# Altium PCB RF315Mhz.PcbDoc
Units mm, origin at the board's own origin, x right, y up, seen from the top; angles counter-clockwise.
Board outline 32.5 x 47.16 mm, 2 copper layers (Top Layer, Bottom Layer); 30 components, 20 nets, 107 pads, 15 vias.
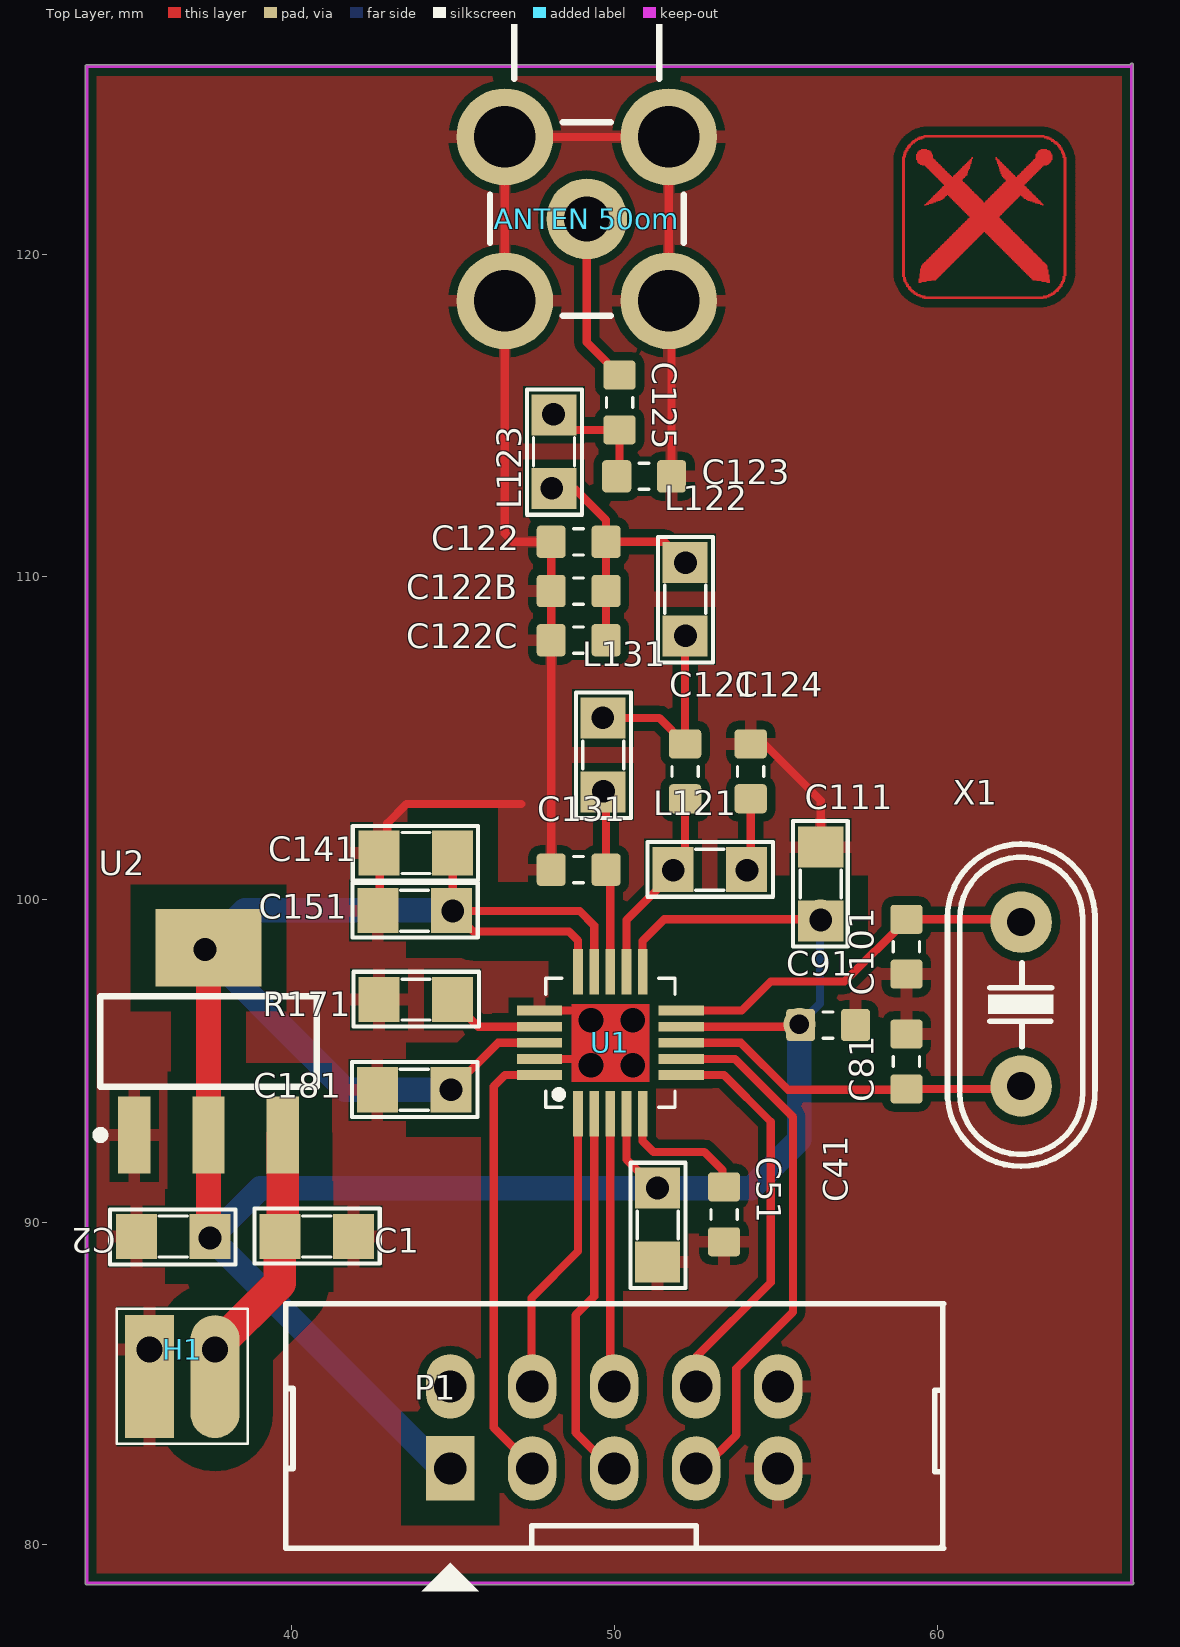
[diagram p0: Top Layer view]
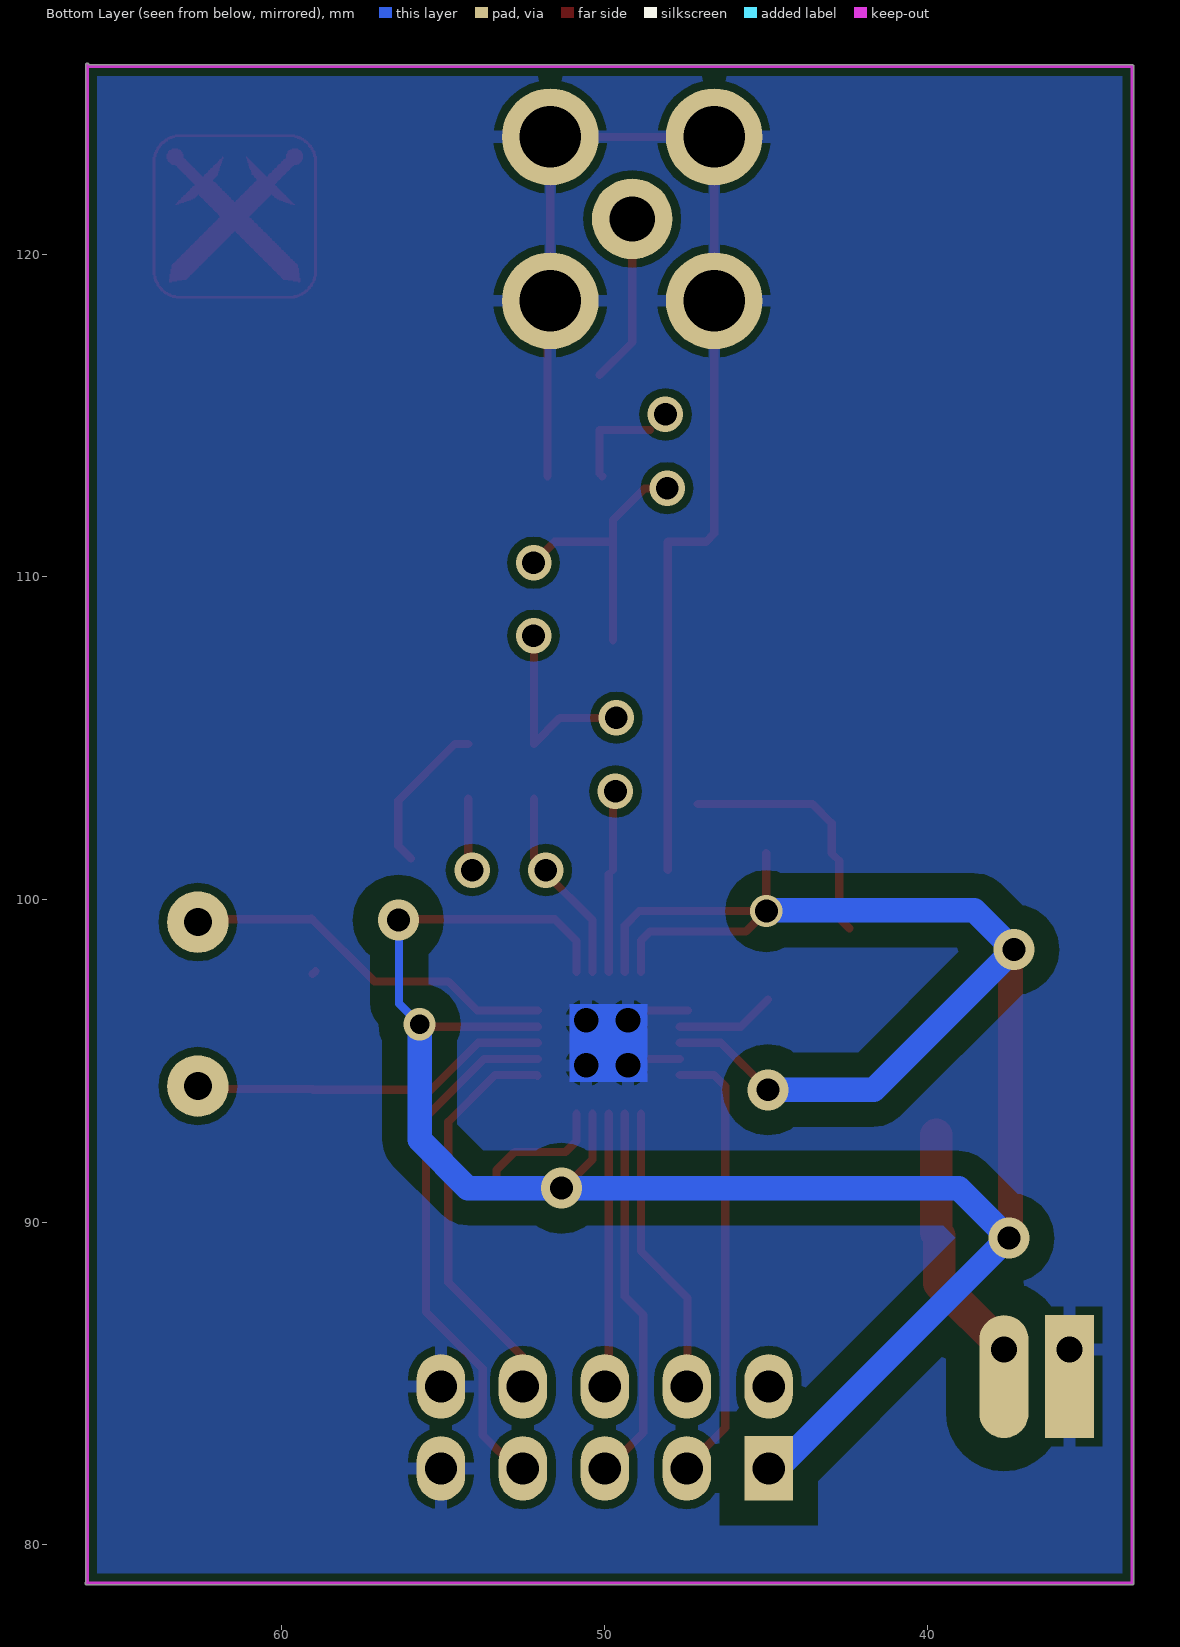
[diagram p1: Bottom Layer view, seen from below]
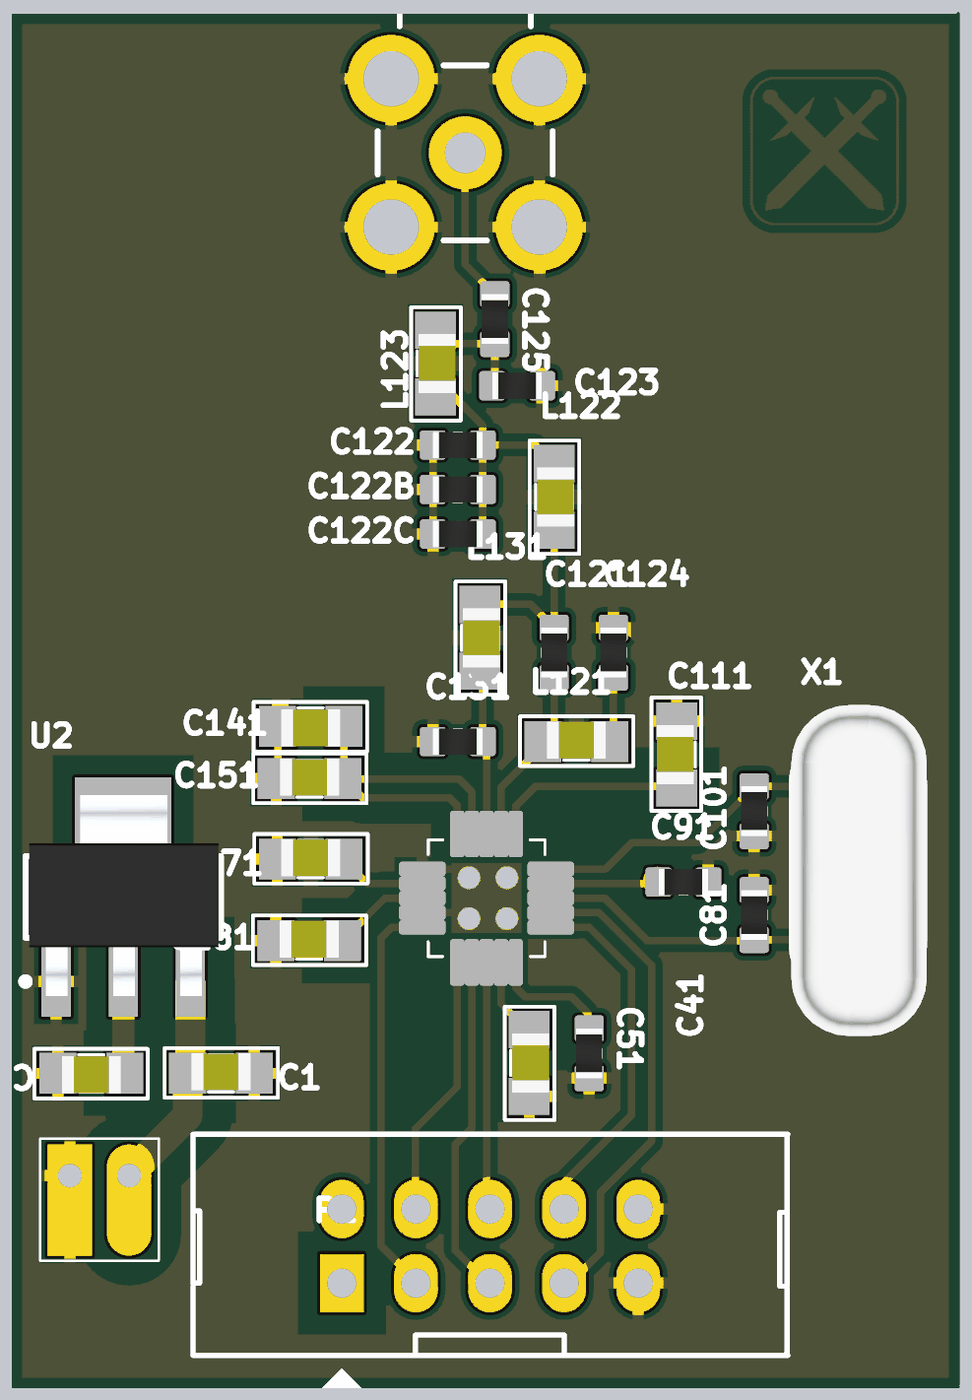
[diagram p2: 3D render of the assembled board from above, using the file's embedded part models]

## Layer stack, top to bottom
Top Layer: signal copper 0.0356
Dielectric: dielectric 0.32, FR-4, Dk 4.8
Bottom Layer: signal copper 0.0356

## Board outline
33.644,78.766 cw(c33.644,78.816) 33.594,78.816 33.594,125.82 cw(c33.644,125.82) 33.644,125.87 65.979,125.87 65.979,125.871 cw(c66.029,125.871) 66.079,125.871 66.079,78.881 cw(c66.029,78.881) 66.072,78.855 cw(c66.04,78.816) 66.09,78.816 cw(c66.04,78.816) 66.04,78.766

## Design rules (kind name [scope] priority, off if disabled: settings)
Clearance 5 [InNet('+5V')] p1: gap=1.016
Clearance 3.3 [InNet('+3.3V')] p2: gap=0.762
Clearance [All] p3: gap=0.254
ComponentClearance [All] p1: gap=0.051 collisioncheckmode=3 verticalgap=0.051 showdistances=FALSE
PolygonConnect [All] p1: connectstyle=Relief reliefconductorwidth=0.381 reliefentries=4 polygonreliefangle="90 Angle" airgapwidth=0.254
RoutingVias [All] p1: holewidth=0.711 width=1.27 viastyle="Through Hole" minholewidth=0.711 minwidth=1.27 maxholewidth=0.711 maxwidth=1.27
ShortCircuit [All] p1: allowed=TRUE
SilkToSilkClearance [All] p1: silktosilkclearance=0.051
SilkToSolderMaskClearance [IsPad] p1: minsilkscreentomaskgap=0 clearancetoexposedcopper=TRUE
SolderMaskExpansion [All] p1: expansion=0.102
Width 5v [InNet('+5V')] p1: maxlimit=1.016 minlimit=1.016 preferedwidth=1.016
Width 3.3v [InNet('+3.3V')] p2: maxlimit=0.254 minlimit=0.254 preferedwidth=0.254
Width [All] p3: maxlimit=0.254 minlimit=0.254 preferedwidth=0.254
24 further rules are at their usual default settings.

## Components (designator, comment, footprint, x,y, rotation, side; value= is the part's Value field where it differs from the comment)
"ANTEN 50om" "Header 2" MCX5.08-H5 49.138,127.598 r270 top
C1 "104" SM-0805 40.767,89.56 r180 top
C2 "104" SM-0805 36.322,89.56 r0 top
C41 "104" SM-0805 51.333,89.916 r90 top
C51 "104" 0603ESDA#1 53.391,90.246 r90 top
C81 "27pF" 0603ESDA#1 59.044,94.984 r270 top
C91 "103" 0603ESDA#2 56.617,96.114 r180 top
C101 "27pF" 0603ESDA#1 59.044,98.54 r90 top
C111 "220pF" SM-0805 56.388,100.482 r270 top
C121 "6.8pF" 0603ESDA#1 52.186,103.976 r270 top
C122 "12pF" 0603ESDA#1 48.884,111.088 r180 top
C122B "12pF" 0603ESDA#1 48.884,109.564 r180 top
C122C "12pF" 0603ESDA#1 48.884,108.04 r180 top
C123 "6.8pF" 0603ESDA#1 50.916,113.12 r0 top
C124 "220pF" 0603ESDA#1 54.218,103.976 r270 top
C125 "220pF" 0603ESDA#1 50.154,115.406 r90 top
C131 "6.8pF" 0603ESDA#1 48.884,100.928 r180 top
C141 "103" SM-0805 43.84,101.448 r0 top
C151 "220pF" SM-0805 43.804,99.658 r180 top
C181 "220pF" SM-0805 43.79,94.107 r180 top
H1 "Header 2" HDR1X2 35.331,86.055 r0 top
L121 "33nH" SM-0805 52.948,100.928 r180 top
L122 "18nH" SM-0805 52.186,109.31 r90 top
L123 "33nH" SM-0805 48.122,113.882 r90 top
L131 "33nH" SM-0805 49.646,104.484 r90 top
P1 "Header 6" Hed2X5 44.907,82.372 r0 top
R171 "56K" SM-0805 43.84,96.901 r180 top
U1 "CC1101" QFN-20Pin 47.868,93.562 r90 top
U2 "LM1117" SOT223-4N 37.414,95.606 r90 top
X1 "26Mhz" XT2 62.6,96.762 r90 top

## Footprints (in the part's own frame and the unit in brackets; to place one, negate y for a bottom-side part, rotate by r counter-clockwise, add the part's x,y. Pads: shape width x height; smd on the part's side, far side on the other; paste and mask are expansions set on the pad)
0603ESDA#1 [mm] "Chip ESD suppressor, Body 1.6x0.8mm, 0603, IPC Medium Density"
  round 0.254 on Mech14: 0(0,0)
  rrect25% 0.9x1 smd: 1(-0.85,0) 2(0.85,0)
  Top Layer pour cut-out: -0.4,0.6 0.4,0.6 0.4,-0.6 -0.4,-0.6
  silkscreen extent -0.15,-0.41 0.15,0.41, body extent -0.85,-0.45 0.85,0.45, height 0.79
0603ESDA#2 [mm] "Chip ESD suppressor, Body 1.6x0.8mm, 0603, IPC Medium Density"
  round 0.254 on Mech15: 0(0,0)
  rrect25% 0.9x1 smd: 1(-0.85,0) 2(0.85,0)
  Top Layer pour cut-out: -0.65,0.5 -0.45,0.7 0.45,0.7 0.65,0.5 0.65,-0.5 0.45,-0.7 -0.45,-0.7 -0.65,-0.5
  silkscreen extent -0.15,-0.41 0.15,0.41, body extent -0.85,-0.45 0.85,0.45, height 0.79
HDR1X2 [mil] "Connector; Header; 2 Position"
  rect 60x150 hole 32 copper offset 0,-33: 1(10,0)
  oval 60x150 hole 32 copper offset 0,-33: 2(90,0)
  silkscreen extent -30,-115 130,50
Hed2X5 [mm] "Header 10x2,20 pin, connecter"
  rect 1.5x2 hole 1: 1(0,0)
  oval 1.5x2 hole 1: 2(0,2.54) 3(2.54,0) 4(2.54,2.54) 5(5.08,0) 6(5.08,2.54) 7(7.62,0) 8(7.62,2.54) 9(10.16,0) 10(10.16,2.54)
  silkscreen extent -5.1,-3.81 15.29,5.11
MCX5.08-H5 [mm] "Chan anten"
  round 2.5 hole 1.4: 1(6.5,0)
  round 3 hole 1.9: 2(3.96,2.54) 2(3.96,-2.54) 2(9.04,-2.54) 2(9.04,2.54)
  silkscreen extent 0,-3 9.5,3
QFN-20Pin [mm] "QFN 20pin 4x4mm"
  rect 1.4x0.3 smd paste+0.1 mask+0.1: 1(-0.2,-1) 2(-0.2,-1.5) 3(-0.2,-2) 4(-0.2,-2.5) 5(-0.2,-3) 11(4.2,-3) 12(4.2,-2.5) 13(4.2,-2) 14(4.2,-1.5) 15(4.2,-1)
  rect 0.3x1.4 smd paste+0.1 mask+0.1: 6(1,-4.2) 7(1.5,-4.2) 8(2,-4.2) 9(2.5,-4.2) 10(3,-4.2) 16(3,0.2) 17(2.5,0.2) 18(2,0.2) 19(1.5,0.2) 20(1,0.2)
  round 0 hole 0.762: 21(1.3,-1.4) 21(1.3,-2.7) 21(2.7,-2.7) 21(2.7,-1.4)
  Top Layer region: 0.8,-0.8 3.2,-0.8 3.2,-3.2 0.8,-3.2
  Bottom Layer region: 0.8,-0.8 3.2,-0.8 3.2,-3.2 0.8,-3.2
  Top Overlay keep-out circle w0.254: c0.4,-0.4 r0.1
  silkscreen extent 0,-4 4,0
SM-0805 [mil] "Compoment SMD 80x50mil"
  rect 50x55 smd: 1(-45,0) 2(45,0)
  silkscreen extent -77,-34 76,33, body extent -40,-27 40,23, height 24
SOT223-4N [mm] "SOT223, 4-Leads, Body 6.5x3.5mm, Pitch 2.3mm, Lead Span 7mm, IPC Medium Density"
  rect 2.4x1 smd: 1(-2.9,2.3) 2(-2.9,0) 3(-2.9,-2.3)
  rect 2.4x3.3 smd: 4(2.9,0)
  silkscreen extent -3.02,-3.35 1.4,3.47, body extent -3.39,-3.27 3.5,3.23, height 1.72
XT2 [mil] "Footpin for Crystal 2 pin"
  round 75 hole 34: 1(-100,0) 2(100,0)
  silkscreen extent -198,-90 195,90, body extent -233,-93 213,90, height 138

## Part data
"ANTEN 50om" H1: library part Hed2, "Header 2 (Green)"
C1 C2: library part Cap, "Capacitor"
C41 C51 C81 C91 C101 C111 C121 C122 C122B C122C C123 C124 C125 C131 C141 C151 C181: library part CM, "Cap SMD"
L121 L122 L123 L131: library part L1, "Inductor"
P1: "Header, 6-Pin"
R171: library part RM, "Resistor SMD"
U1: "Transceiver 315Mhz"
U2: "3v3"
X1: library part XT2, "Crystal For all Crystal 2pin."

## Via types
v1: diameter 1.1, hole 0.7, Top Layer to Bottom Layer, 8 vias
v2: diameter 1.27, hole 0.711, Top Layer to Bottom Layer, 5 vias
v3: diameter 1, hole 0.711, Top Layer to Bottom Layer, 1 vias
v4: diameter 1, hole 0.6, Top Layer to Bottom Layer, 1 vias

## Nets (pads, with @x,y where several pads share a name; then routed paths per layer and width w, separated by ;. In a path a pad name is that pad's centre, name@x,y a point inside that pad or via, vN(x,y) a via of type N, cw(c..) or ccw(c..) an arc to the next point about the centre after c; other vN are vias at no path point)
+3.3V: C2.2 C41.2 C91.2 C111.2 C141.2 C151.1 C181.1 P1.1 U1.4 U1.9 U1.11 U1.14 U1.15 U1.18 U2.2 U2.4 | length 93.2
  Top Layer w0.254: v2(44.933,94.107) 46.388,95.562 U1.18 ; C151.1@44.983,99.67 C141.2 ; U1.15 48.868,98.731 48.59,99.009 45.618,99.009 v3(44.983,99.644) 48.92,99.644 49.368,99.197 U1.14 ; U1.4 50.368,91.948 C41.2@51.257,91.059 ; U1.11 50.868,98.722 51.537,99.39 56.413,99.39 C111.2@56.464,99.339 ; U1.9 55.752,96.062 C91.2@55.778,96.088
  Top Layer w0.762: U2.4@37.313,98.501 37.414,98.4 U2.2 C2.2@37.414,89.51
  Bottom Layer w0.254: v4(55.728,96.139) 56.363,96.774 v2@56.363,99.39
  Bottom Layer w0.762: v2(37.465,89.51) v2@37.478,89.522 ; P1.1 44.628,82.372 v2@37.478,89.522 ; v2(44.933,94.107) 41.656,94.107 v2(37.313,98.45) 38.532,99.67 v3@44.958,99.67 ; v2(51.333,91.059) 54.229,91.059 55.728,92.558 55.728,96.063 v4@55.753,96.088 ; v2@51.333,91.11 51.283,91.059 39.014,91.059 v2@37.478,89.522
  other v2: 56.388,99.365
+5V: C1.2 H1.2 U2.3 | length 7.5
  Top Layer w1.016: H1.2@37.567,86.055 39.624,88.113 C1.2 ; C1.2@39.624,89.586 39.714,89.676 U2.3
CSN: P1.7 U1.7 | length 16.5
  Top Layer w0.254: U1.7 53.731,95.062 55.524,93.269 55.524,87.224 53.772,85.471 53.772,83.414 52.73,82.372 P1.7 P1.7@52.502,82.372
GDO0: P1.8 U1.6 | length 12.5
  Top Layer w0.254: U1.6@52.07,94.539 52.095,94.564 53.391,94.564 54.839,93.116 54.839,88.138 52.527,85.827 P1.8
GDO2: P1.6 U1.3 | length 8.5
  Top Layer w0.254: U1.3 49.868,85.057 P1.6@49.987,84.938
GND: "ANTEN 50om.2" C1.1 C2.1 C41.1 C51.1 C81.1 C91.1 C101.1 C111.1 C122.2 C122B.2 C122C.2 C123.2 C124.1 C131.2 C141.1 C151.2 C181.2 H1.1 P1.9 P1.10 R171.2 U1.16 U1.19 U1.21 U2.1 | length 56
  Top Layer w0.254: C151.2@42.407,99.111 C151.2@42.954,99.658 ; C151.2@42.723,99.889 42.723,101.205 42.954,101.436 42.954,102.364 43.55,102.96 47.106,102.96 ; U1.16@47.408,96.562 U1.16 48.929,96.562 49.251,96.241 ; U1.19 49.134,95.062 49.301,94.894 ; C131.2 48.034,102.032 C122C.2 C122B.2 C122.2 46.852,111.088 46.598,111.342 46.598,118.558 46.598,123.638 51.678,123.638 51.678,118.558 51.766,118.47 C123.2 ; C124.1 54.638,104.826 56.388,103.076 56.388,101.662 C111.1@55.996,101.27 ; C101.1@58.956,97.778 C101.1
"NetANTEN 50om_1": "ANTEN 50om.1" C125.2 | length 5.3
  Top Layer w0.254: 49.138,121.098 49.138,117.272 C125.2
NetC51_2: C51.2 U1.5 | length 4.2
  Top Layer w0.254: U1.5 50.868,92.515 51.206,92.177 52.781,92.177 53.34,91.618 C51.2@53.34,91.084
NetC81_2: C81.2 U1.8 X1.1 | length 11
  Top Layer w0.254: U1.8 53.917,95.562 55.372,94.107 C81.2@59.03,94.107 ; C81.2 X1.1@62.512,94.134
NetC101_2: C101.2 U1.10 X1.2 | length 11.8
  Top Layer w0.254: U1.10 53.941,96.562 54.839,97.46 57.125,97.46 C101.2@59.055,99.39 ; C101.2@59.08,99.416 C101.2@59.055,99.39 ; X1.2 62.512,99.39 C101.2@59.055,99.39
NetC121_1: C121.1 L122.1 L131.2 | length 6.2
  Top Layer w0.254: L131.2 51.385,105.627 C121.1 L122.1
  other v1: 49.632,105.639 52.197,108.179
NetC121_2: C121.2 L121.2 U1.12 | length 6.1
  Top Layer w0.254: U1.12 50.368,99.364 51.805,100.801 L121.2 52.186,101.309 C121.2
  other v1: 51.816,100.914
NetC122_1: C122.1 C122B.1 C122C.1 L122.2 L123.1 | length 8.5
  Top Layer w0.254: L123.1 48.757,112.739 49.734,111.762 C122.1 ; C122C.1 C122B.1 C122.1 ; L122.2 51.551,111.088 C122.1
  other v1: 52.197,110.439 48.057,112.751
NetC123_1: C123.1 C125.1 L123.2 | length 3
  Top Layer w0.254: L123.2@48.591,114.556 C125.1 50.154,113.208 C123.1
  other v1: 48.108,115.037
NetC124_2: C124.2 L121.1 | length 2.3
  Top Layer w0.254: L121.1 54.218,101.055 C124.2
  other v1: 54.102,100.914
NetC131_1: C131.1 L131.1 U1.13 | length 5.4
  Top Layer w0.254: C131.1 L131.1@49.734,103.253 ; U1.13 C131.1@49.868,100.794
  other v1: 49.657,103.353
NetR171_1: R171.1 U1.17 | length 3.1
  Top Layer w0.254: R171.1@44.933,96.901 45.772,96.062 U1.17
SCK: P1.4 U1.1 | length 9
  Top Layer w0.254: P1.4@47.422,84.912 47.422,87.655 48.868,89.102 U1.1
SI: P1.3 U1.20 | length 13.9
  Top Layer w0.254: P1.3@47.498,82.398 46.253,83.642 46.253,94.209 46.607,94.562 U1.20
SO: P1.5 U1.2 | length 11.8
  Top Layer w0.254: U1.2 49.368,87.697 48.793,87.122 48.793,83.49 P1.5@50.013,82.271
pads on no net: C51.0 C81.0 C91.0 C101.0 C121.0 C122.0 C122B.0 C122C.0 C123.0 C124.0 C125.0 C131.0 P1.2
copper on no net: | length 309.7
  Top Layer w0.025: 58.917,119.318 58.993,119.318 ; 58.917,119.343 58.993,119.343 ; 58.917,119.368 58.993,119.368 ; 58.917,119.394 58.993,119.394 ; 58.917,119.419 58.993,119.419 ; 58.917,119.445 58.993,119.445 ; 58.917,119.47 58.993,119.47 ; 58.917,119.495 58.993,119.495 ; 58.917,119.521 58.993,119.521 ; 58.917,119.546 58.993,119.546 ; 58.917,119.572 58.993,119.572 ; 58.917,119.597 58.993,119.597 ; 58.917,119.622 58.993,119.622 ; 58.917,119.648 58.993,119.648 ; 58.917,119.673 58.993,119.673 ; 58.917,119.699 58.993,119.699 ; 58.917,119.724 58.993,119.724 ; 58.917,119.749 58.993,119.749 ; 58.917,119.775 58.993,119.775 ; 58.917,119.8 58.993,119.8 ; 58.917,119.826 58.993,119.826 ; 58.917,119.851 58.993,119.851 ; 58.917,119.876 58.993,119.876 ; 58.917,119.902 58.993,119.902 ; 58.917,119.927 58.993,119.927 ; 58.917,119.953 58.993,119.953 ; 58.917,119.978 58.993,119.978 ; 58.917,120.003 58.993,120.003 ; 58.917,120.029 58.993,120.029 ; 58.917,120.054 58.993,120.054 ; 58.917,120.08 58.993,120.08 ; 58.917,120.105 58.993,120.105 ; 58.917,120.13 58.993,120.13 ; 58.917,120.156 58.993,120.156 ; 58.917,120.181 58.993,120.181 ; 58.917,120.207 58.993,120.207 ; 58.917,120.232 58.993,120.232 ; 58.917,120.257 58.993,120.257 ; 58.917,120.283 58.993,120.283 ; 58.917,120.308 58.993,120.308 ; 58.917,120.334 58.993,120.334 ; 58.917,120.359 58.993,120.359 ; 58.917,120.384 58.993,120.384 ; 58.917,120.41 58.993,120.41 ; 58.917,120.435 58.993,120.435 ; 58.917,120.461 58.993,120.461 ; 58.917,120.486 58.993,120.486 ; 58.917,120.511 58.993,120.511 ; 58.917,120.537 58.993,120.537 ; 58.917,120.562 58.993,120.562 ; 58.917,120.588 58.993,120.588 ; 58.917,120.613 58.993,120.613 ; 58.917,120.638 58.993,120.638 ; 58.917,120.664 58.993,120.664 ; 58.917,120.689 58.993,120.689 ; 58.917,120.715 58.993,120.715 ; 58.917,120.74 58.993,120.74 ; 58.917,120.765 58.993,120.765 ; 58.917,120.791 58.993,120.791 ; 58.917,120.816 58.993,120.816 ; 58.917,120.842 58.993,120.842 ; 58.917,120.867 58.993,120.867 ; 58.917,120.892 58.993,120.892 ; 58.917,120.918 58.993,120.918 ; 58.917,120.943 58.993,120.943 ; 58.917,120.969 58.993,120.969 ; 58.917,120.994 58.993,120.994 ; 58.917,121.019 58.993,121.019 ; 58.917,121.045 58.993,121.045 ; 58.917,121.07 58.993,121.07 ; 58.917,121.096 58.993,121.096 ; 58.917,121.121 58.993,121.121 ; 58.917,121.146 58.993,121.146 ; 58.917,121.172 58.993,121.172 ; 58.917,121.197 58.993,121.197 ; 58.917,121.223 58.993,121.223 ; 58.917,121.248 58.993,121.248 ; 58.917,121.273 58.993,121.273 ; 58.917,121.299 58.993,121.299 ; 58.917,121.324 58.993,121.324 ; 58.917,121.35 58.993,121.35 ; 58.917,121.375 58.993,121.375 ; 58.917,121.4 58.993,121.4 ; 58.917,121.426 58.993,121.426 ; 58.917,121.451 58.993,121.451 ; 58.917,121.477 58.993,121.477 ; 58.917,121.502 58.993,121.502 ; 58.917,121.527 58.993,121.527 ; 58.917,121.553 58.993,121.553 ; 58.917,121.578 58.993,121.578 ; 58.917,121.604 58.993,121.604 ; 58.917,121.629 58.993,121.629 ; 58.917,121.654 58.993,121.654 ; 58.917,121.68 58.993,121.68 ; 58.917,121.705 58.993,121.705 ; 58.917,121.731 58.993,121.731 ; 58.917,121.756 58.993,121.756 ; 58.917,121.781 58.993,121.781 ; 58.917,121.807 58.993,121.807 ; 58.917,121.832 58.993,121.832 ; 58.917,121.858 58.993,121.858 ; 58.917,121.883 58.993,121.883 ; 58.917,121.908 58.993,121.908 ; 58.917,121.934 58.993,121.934 ; 58.917,121.959 58.993,121.959 ; 58.917,121.985 58.993,121.985 ; 58.917,122.01 58.993,122.01 ; 58.917,122.035 58.993,122.035 ; 58.917,122.061 58.993,122.061 ; 58.917,122.086 58.993,122.086 ; 58.917,122.112 58.993,122.112 ; 58.917,122.137 58.993,122.137 ; 58.917,122.162 58.993,122.162 ; 58.917,122.188 58.993,122.188 ; 58.917,122.213 58.993,122.213 ; 58.917,122.239 58.993,122.239 ; 58.917,122.264 58.993,122.264 ; 58.917,122.289 58.993,122.289 ; 58.917,122.315 58.993,122.315 ; 58.917,122.34 58.993,122.34 ; 58.917,122.366 58.993,122.366 ; 58.917,122.391 58.993,122.391 ; 58.917,122.416 58.993,122.416 ; 58.917,122.442 58.993,122.442 ; 58.917,122.467 58.993,122.467 ; 58.917,122.493 58.993,122.493 ; 58.917,122.518 58.993,122.518 ; 58.917,122.543 58.993,122.543 ; 58.917,122.569 58.993,122.569 ; 58.917,122.594 58.993,122.594 ; 58.917,122.62 58.993,122.62 ; 58.917,122.645 58.993,122.645 ; 58.917,122.67 58.993,122.67 ; 58.917,122.696 58.993,122.696 ; 58.917,122.721 58.993,122.721 ; 58.917,122.747 58.993,122.747 ; 58.917,122.772 58.993,122.772 ; 58.917,122.797 58.993,122.797 ; 58.917,122.823 58.993,122.823 ; 58.917,122.848 58.993,122.848 ; 58.917,122.874 58.993,122.874 ; 58.917,122.899 58.993,122.899 ; 58.917,122.924 58.993,122.924 ; 58.917,122.95 58.993,122.95 ; 58.917,122.975 58.993,122.975 ; 58.917,123.001 58.993,123.001 ; 58.917,123.026 59.019,123.026 ; 58.942,119.216 59.044,119.216 ; 58.942,119.241 59.019,119.241 ; 58.942,119.267 59.019,119.267 ; 58.942,119.292 59.019,119.292 ; 58.942,123.051 59.019,123.051 ; 58.942,123.077 59.019,123.077 ; 58.942,123.102 59.044,123.102 ; 58.968,119.165 59.044,119.165 ; 58.968,119.191 59.044,119.191 ; 58.968,123.128 59.044,123.128 ; 58.968,123.153 59.044,123.153 ; 58.968,123.178 59.069,123.178 ; 58.993,119.114 59.069,119.114 ; 58.993,119.14 59.069,119.14 ; 58.993,123.204 59.069,123.204 ; 58.993,123.229 59.095,123.229 ; 59.019,119.064 59.12,119.064 ; 59.019,119.089 59.095,119.089 ; 59.019,123.255 59.095,123.255 ; 59.019,123.28 59.12,123.28 ; 59.044,119.013 59.146,119.013 ; 59.044,119.038 59.12,119.038 ; 59.044,123.305 59.146,123.305 ; 59.069,118.987 59.171,118.987 ; 59.069,123.331 59.171,123.331 ; 59.069,123.356 59.171,123.356 ; 59.095,118.937 59.196,118.937 ; 59.095,118.962 59.196,118.962 ; 59.095,123.382 59.196,123.382 ; 59.12,118.911 59.222,118.911 ; 59.12,123.407 59.222,123.407 ; 59.146,118.886 59.273,118.886 ; 59.146,123.432 59.247,123.432 ; 59.171,118.86 59.298,118.86 ; 59.171,123.458 59.298,123.458 ; 59.196,118.835 59.323,118.835 ; 59.196,123.483 59.323,123.483 ; 59.222,123.509 59.349,123.509 ; 59.247,118.81 59.374,118.81 ; 59.247,123.534 59.4,123.534 ; 59.273,118.784 59.4,118.784 ; 59.298,118.759 59.476,118.759 ; 59.298,123.559 59.45,123.559 ; 59.323,123.585 59.527,123.585 ; 59.349,118.733 59.527,118.733 ; 59.349,122.95 59.908,122.95 ; 59.349,122.975 59.882,122.975 ; 59.349,123.001 59.857,123.001 ; 59.349,123.026 59.857,123.026 ; 59.349,123.051 59.857,123.051 ; 59.349,123.077 59.857,123.077 ; 59.349,123.102 59.831,123.102 ; 59.374,122.899 59.958,122.899 ; 59.374,122.924 59.933,122.924 ; 59.374,123.128 59.831,123.128 ; 59.374,123.153 59.806,123.153 ; 59.374,123.61 59.603,123.61 ; 59.4,118.708 59.628,118.708 ; 59.4,122.848 60.009,122.848 ; 59.4,122.874 59.984,122.874 ; 59.4,123.178 59.806,123.178 ; 59.425,119.14 59.501,119.14 ; 59.425,119.165 59.654,119.165 ; 59.425,119.191 59.806,119.191 ; 59.425,119.216 59.958,119.216 ; 59.425,119.241 59.984,119.241 ; 59.425,122.823 60.035,122.823 ; 59.425,123.204 59.781,123.204 ; 59.425,123.636 63.464,123.636 ; 59.45,118.683 63.464,118.683 ; 59.45,119.267 60.009,119.267 ; 59.45,119.292 60.035,119.292 ; 59.45,119.318 60.06,119.318 ; 59.45,119.343 60.085,119.343 ; 59.45,119.368 60.111,119.368 ; 59.45,119.394 60.136,119.394 ; 59.45,123.229 59.73,123.229 ; 59.476,119.419 60.162,119.419 ; 59.476,119.445 60.187,119.445 ; 59.476,119.47 60.212,119.47 ; 59.476,119.495 60.238,119.495 ; 59.476,119.521 60.263,119.521 ; 59.476,119.546 60.289,119.546 ; 59.476,122.797 60.06,122.797 ; 59.501,119.572 60.314,119.572 ; 59.501,119.597 60.339,119.597 ; 59.501,119.622 60.365,119.622 ; 59.501,119.648 60.39,119.648 ; 59.501,123.255 59.679,123.255 ; 59.501,123.661 63.413,123.661 ; 59.527,118.657 63.387,118.657 ; 59.527,119.673 60.416,119.673 ; 59.527,122.772 60.085,122.772 ; 59.552,119.699 60.441,119.699 ; 59.577,119.724 60.466,119.724 ; 59.577,123.686 63.311,123.686 ; 59.603,118.632 63.286,118.632 ; 59.603,119.749 60.492,119.749 ; 59.603,121.527 59.654,121.527 ; 59.628,119.775 60.517,119.775 ; 59.628,121.553 59.73,121.553 ; 59.628,122.747 60.111,122.747 ; 59.654,119.8 60.543,119.8 ; 59.654,121.578 59.806,121.578 ; 59.654,122.721 60.136,122.721 ; 59.679,119.826 60.568,119.826 ; 59.679,121.604 59.882,121.604 ; 59.679,122.696 60.162,122.696 ; 59.704,119.851 60.593,119.851 ; 59.704,121.629 59.958,121.629 ; 59.704,122.67 60.187,122.67 ; 59.73,119.876 60.619,119.876 ; 59.73,121.654 60.009,121.654 ; 59.73,122.645 60.212,122.645 ; 59.755,119.902 60.644,119.902 ; 59.755,121.68 60.085,121.68 ; 59.755,122.62 60.238,122.62 ; 59.781,119.927 60.67,119.927 ; 59.781,121.705 60.162,121.705 ; 59.781,122.594 60.263,122.594 ; 59.806,119.953 60.695,119.953 ; 59.806,121.731 60.187,121.731 ; 59.806,122.569 60.289,122.569 ; 59.831,119.978 60.72,119.978 ; 59.831,121.756 60.212,121.756 ; 59.831,122.543 60.314,122.543 ; 59.857,120.003 60.746,120.003 ; 59.857,121.781 60.238,121.781 ; 59.857,122.518 60.339,122.518 ; 59.882,120.029 60.771,120.029 ; 59.882,121.807 60.263,121.807 ; 59.882,122.493 60.365,122.493 ; 59.908,120.054 60.797,120.054 ; 59.908,121.832 60.289,121.832 ; 59.908,122.467 60.39,122.467 ; 59.933,120.08 60.822,120.08 ; 59.933,121.858 61.203,121.858 ; 59.933,122.442 60.416,122.442 ; 59.958,120.105 60.847,120.105 ; 59.958,121.883 61.178,121.883 ; 59.958,122.416 60.441,122.416 ; 59.984,120.13 60.873,120.13 ; 59.984,121.908 61.152,121.908 ; 59.984,122.391 60.847,122.391 ; 60.009,120.156 60.898,120.156 ; 60.009,121.934 61.127,121.934 ; 60.009,122.366 60.822,122.366 ; 60.035,120.181 60.924,120.181 ; 60.035,121.959 61.101,121.959 ; 60.035,122.34 60.797,122.34 ; 60.06,120.207 60.949,120.207 ; 60.06,121.985 61.076,121.985 ; 60.06,122.315 60.771,122.315 ; 60.085,120.232 60.974,120.232 ; 60.085,122.01 61.051,122.01 ; 60.085,122.289 60.771,122.289 ; 60.111,120.257 61,120.257 ; 60.111,122.035 61.025,122.035 ; 60.111,122.264 60.797,122.264 ; 60.136,120.283 61.025,120.283 ; 60.136,122.061 61,122.061 ; 60.136,122.239 60.822,122.239 ; 60.162,120.308 61.051,120.308 ; 60.162,122.086 60.974,122.086 ; 60.162,122.213 60.847,122.213 ; 60.187,120.334 61.076,120.334 ; 60.187,122.112 60.949,122.112 ; 60.187,122.188 60.873,122.188 ; 60.212,120.359 61.101,120.359 ; 60.212,122.137 60.924,122.137 ; 60.212,122.162 60.898,122.162 ; 60.238,120.384 61.127,120.384 ; 60.263,120.41 61.152,120.41 ; 60.289,120.435 61.178,120.435 ; 60.314,120.461 61.203,120.461 ; 60.339,120.486 61.228,120.486 ; 60.339,121.832 61.228,121.832 ; 60.365,120.511 61.254,120.511 ; 60.365,121.807 61.254,121.807 ; 60.39,120.537 61.279,120.537 ; 60.39,121.781 61.279,121.781 ; 60.416,120.562 61.305,120.562 ; 60.416,121.756 61.305,121.756 ; 60.441,120.588 61.33,120.588 ; 60.441,121.731 61.33,121.731 ; 60.466,120.613 61.355,120.613 ; 60.466,121.705 61.355,121.705 ; 60.492,120.638 61.381,120.638 ; 60.492,121.68 61.381,121.68 ; 60.492,122.416 60.873,122.416 ; 60.517,120.664 61.406,120.664 ; 60.517,121.654 61.406,121.654 ; 60.517,122.442 60.898,122.442 ; 60.543,120.689 61.432,120.689 ; 60.543,121.629 61.432,121.629 ; 60.543,122.467 60.924,122.467 ; 60.568,120.715 62.346,120.715 ; 60.568,121.604 62.346,121.604 ; 60.568,122.493 60.924,122.493 ; 60.593,120.74 62.321,120.74 ; 60.593,121.578 62.321,121.578 ; 60.593,122.518 60.924,122.518 ; 60.619,120.765 62.295,120.765 ; 60.619,121.553 62.295,121.553 ; 60.619,122.543 60.949,122.543 ; 60.644,120.791 62.27,120.791 ; 60.644,121.527 62.27,121.527 ; 60.644,122.569 60.949,122.569 ; 60.67,120.816 62.244,120.816 ; 60.67,121.502 62.244,121.502 ; 60.67,122.594 60.949,122.594 ; 60.695,120.842 62.219,120.842 ; 60.695,121.477 62.219,121.477 ; 60.695,122.62 60.974,122.62 ; 60.72,120.867 62.194,120.867 ; 60.72,121.451 62.194,121.451 ; 60.72,122.645 60.974,122.645 ; 60.746,120.892 62.168,120.892 ; 60.746,121.426 62.168,121.426 ; 60.746,122.67 61,122.67 ; 60.771,120.918 62.143,120.918 ; 60.771,121.4 62.143,121.4 ; 60.771,122.696 61,122.696 ; 60.797,120.943 62.117,120.943 ; 60.797,121.375 62.117,121.375 ; 60.797,122.721 61,122.721 ; 60.822,120.969 62.092,120.969 ; 60.822,121.35 62.092,121.35 ; 60.822,122.747 61.025,122.747 ; 60.847,120.994 62.067,120.994 ; 60.847,121.324 62.067,121.324 ; 60.847,122.772 61.025,122.772 ; 60.873,121.019 62.041,121.019 ; 60.873,121.299 62.041,121.299 ; 60.873,122.797 61.025,122.797 ; 60.898,121.045 62.016,121.045 ; 60.898,121.273 62.016,121.273 ; 60.898,122.823 61.051,122.823 ; 60.924,121.07 61.99,121.07 ; 60.924,121.248 61.99,121.248 ; 60.924,122.848 61.051,122.848 ; 60.949,121.096 61.965,121.096 ; 60.949,121.223 61.965,121.223 ; 60.949,122.874 61.051,122.874 ; 60.974,121.121 61.94,121.121 ; 60.974,121.197 61.94,121.197 ; 60.974,122.899 61.076,122.899 ; 61,121.146 61.914,121.146 ; 61,121.172 61.914,121.172 ; 61,122.924 61.076,122.924 ; 61.025,122.95 61.076,122.95 ; 61.051,122.975 61.101,122.975 ; 61.076,123.001 61.101,123.001 ; 61.482,120.689 62.371,120.689 ; 61.482,121.629 62.371,121.629 ; 61.508,120.664 62.397,120.664 ; 61.508,121.654 62.397,121.654 ; 61.533,120.638 62.422,120.638 ; 61.533,121.68 62.422,121.68 ; 61.559,120.613 62.448,120.613 ; 61.559,121.705 62.448,121.705 ; 61.584,120.588 62.473,120.588 ; 61.584,121.731 62.473,121.731 ; 61.609,120.562 62.498,120.562 ; 61.609,121.756 62.498,121.756 ; 61.635,120.537 62.524,120.537 ; 61.635,121.781 62.524,121.781 ; 61.66,120.511 62.549,120.511 ; 61.66,121.807 62.549,121.807 ; 61.686,120.486 62.575,120.486 ; 61.686,121.832 62.575,121.832 ; 61.711,120.461 62.6,120.461 ; 61.711,121.858 62.981,121.858 ; 61.736,120.435 62.625,120.435 ; 61.736,121.883 62.956,121.883 ; 61.762,120.41 62.651,120.41 ; 61.762,121.908 62.93,121.908 ; 61.787,120.384 62.676,120.384 ; 61.787,121.934 62.905,121.934 ; 61.813,120.359 62.702,120.359 ; 61.813,121.959 62.879,121.959 ; 61.813,122.95 61.889,122.95 ; 61.813,122.975 61.863,122.975 ; 61.813,123.001 61.838,123.001 ; 61.838,120.334 62.727,120.334 ; 61.838,121.985 62.854,121.985 ; 61.838,122.899 61.94,122.899 ; 61.838,122.924 61.914,122.924 ; 61.863,120.308 62.752,120.308 ; 61.863,122.01 62.829,122.01 ; 61.863,122.823 62.016,122.823 ; 61.863,122.848 61.99,122.848 ; 61.863,122.874 61.965,122.874 ; 61.889,120.283 62.778,120.283 ; 61.889,122.035 62.803,122.035 ; 61.889,122.747 62.092,122.747 ; 61.889,122.772 62.067,122.772 ; 61.889,122.797 62.041,122.797 ; 61.914,120.257 62.803,120.257 ; 61.914,122.061 62.778,122.061 ; 61.914,122.67 62.168,122.67 ; 61.914,122.696 62.143,122.696 ; 61.914,122.721 62.117,122.721 ; 61.94,120.232 62.829,120.232 ; 61.94,122.086 62.752,122.086 ; 61.94,122.594 62.244,122.594 ; 61.94,122.62 62.219,122.62 ; 61.94,122.645 62.194,122.645 ; 61.965,120.207 62.854,120.207 ; 61.965,122.112 62.727,122.112 ; 61.965,122.518 62.321,122.518 ; 61.965,122.543 62.295,122.543 ; 61.965,122.569 62.27,122.569 ; 61.99,120.181 62.879,120.181 ; 61.99,122.137 62.702,122.137 ; 61.99,122.442 62.397,122.442 ; 61.99,122.467 62.371,122.467 ; 61.99,122.493 62.346,122.493 ; 62.016,120.156 62.905,120.156 ; 62.016,122.162 62.702,122.162 ; 62.016,122.416 62.422,122.416 ; 62.041,120.13 62.93,120.13 ; 62.041,122.188 62.727,122.188 ; 62.041,122.391 62.93,122.391 ; 62.067,120.105 62.956,120.105 ; 62.067,122.213 62.752,122.213 ; 62.067,122.366 62.905,122.366 ; 62.092,120.08 62.981,120.08 ; 62.092,122.239 62.778,122.239 ; 62.092,122.34 62.879,122.34 ; 62.117,120.054 63.006,120.054 ; 62.117,122.264 62.803,122.264 ; 62.117,122.315 62.854,122.315 ; 62.143,120.029 63.032,120.029 ; 62.143,122.289 62.829,122.289 ; 62.168,120.003 63.057,120.003 ; 62.194,119.978 63.083,119.978 ; 62.219,119.953 63.108,119.953 ; 62.244,119.927 63.133,119.927 ; 62.27,119.902 63.159,119.902 ; 62.295,119.876 63.184,119.876 ; 62.321,119.851 63.21,119.851 ; 62.346,119.826 63.235,119.826 ; 62.371,119.8 63.26,119.8 ; 62.397,119.775 63.286,119.775 ; 62.422,119.749 63.311,119.749 ; 62.448,119.724 63.337,119.724 ; 62.473,119.699 63.362,119.699 ; 62.473,122.416 62.956,122.416 ; 62.498,119.673 63.387,119.673 ; 62.498,122.442 62.981,122.442 ; 62.524,119.648 63.413,119.648 ; 62.524,122.467 63.006,122.467 ; 62.549,119.622 63.413,119.622 ; 62.549,122.493 63.032,122.493 ; 62.575,119.597 63.413,119.597 ; 62.575,122.518 63.057,122.518 ; 62.6,119.572 63.413,119.572 ; 62.6,121.832 63.006,121.832 ; 62.6,122.543 63.083,122.543 ; 62.625,119.546 63.413,119.546 ; 62.625,121.807 63.032,121.807 ; 62.625,122.569 63.108,122.569 ; 62.651,119.521 63.438,119.521 ; 62.651,121.781 63.057,121.781 ; 62.651,122.594 63.133,122.594 ; 62.676,119.495 63.438,119.495 ; 62.676,121.756 63.083,121.756 ; 62.676,122.62 63.159,122.62 ; 62.702,119.47 63.438,119.47 ; 62.702,121.731 63.108,121.731 ; 62.702,122.645 63.184,122.645 ; 62.727,119.445 63.438,119.445 ; 62.727,122.67 63.21,122.67 ; 62.752,119.419 63.438,119.419 ; 62.752,121.705 63.133,121.705 ; 62.752,122.696 63.235,122.696 ; 62.778,119.394 63.438,119.394 ; 62.778,122.721 63.26,122.721 ; 62.803,119.368 63.464,119.368 ; 62.803,121.68 63.159,121.68 ; 62.803,122.747 63.286,122.747 ; 62.829,119.343 63.464,119.343 ; 62.829,122.772 63.387,122.772 ; 62.854,119.318 63.464,119.318 ; 62.854,122.797 63.438,122.797 ; 62.879,119.292 63.464,119.292 ; 62.879,121.654 63.184,121.654 ; 62.879,122.823 63.464,122.823 ; 62.905,119.267 63.464,119.267 ; 62.905,122.848 63.489,122.848 ; 62.93,119.241 63.464,119.241 ; 62.93,122.874 63.514,122.874 ; 62.956,119.216 63.489,119.216 ; 62.956,121.629 63.21,121.629 ; 62.956,122.899 63.54,122.899 ; 62.981,122.924 63.54,122.924 ; 63.006,122.95 63.565,122.95 ; 63.032,121.604 63.235,121.604 ; 63.032,122.975 63.565,122.975 ; 63.057,123.001 63.565,123.001 ; 63.057,123.026 63.565,123.026 ; 63.057,123.051 63.565,123.051 ; 63.057,123.077 63.565,123.077 ; 63.057,123.102 63.54,123.102 ; 63.083,119.191 63.489,119.191 ; 63.083,123.128 63.54,123.128 ; 63.083,123.153 63.514,123.153 ; 63.108,121.578 63.26,121.578 ; 63.108,123.178 63.514,123.178 ; 63.133,123.204 63.489,123.204 ; 63.159,123.229 63.438,123.229 ; 63.184,121.553 63.286,121.553 ; 63.21,123.255 63.387,123.255 ; 63.235,119.165 63.489,119.165 ; 63.26,121.527 63.286,121.527 ; 63.286,118.708 63.514,118.708 ; 63.311,123.61 63.54,123.61 ; 63.387,118.733 63.565,118.733 ; 63.387,119.14 63.489,119.14 ; 63.387,123.585 63.565,123.585 ; 63.438,118.759 63.616,118.759 ; 63.464,123.559 63.616,123.559 ; 63.489,118.784 63.641,118.784 ; 63.514,123.534 63.641,123.534 ; 63.54,118.81 63.667,118.81 ; 63.54,123.509 63.692,123.509 ; 63.591,118.835 63.692,118.835 ; 63.591,123.483 63.718,123.483 ; 63.616,118.86 63.743,118.86 ; 63.616,123.458 63.743,123.458 ; 63.641,118.886 63.768,118.886 ; 63.641,123.432 63.768,123.432 ; 63.667,118.911 63.768,118.911 ; 63.692,118.937 63.794,118.937 ; 63.692,123.407 63.794,123.407 ; 63.718,118.962 63.819,118.962 ; 63.718,123.356 63.819,123.356 ; 63.718,123.382 63.819,123.382 ; 63.743,118.987 63.845,118.987 ; 63.743,123.331 63.845,123.331 ; 63.768,119.013 63.87,119.013 ; 63.768,123.305 63.87,123.305 ; 63.794,119.038 63.87,119.038 ; 63.794,119.064 63.895,119.064 ; 63.794,123.255 63.895,123.255 ; 63.794,123.28 63.87,123.28 ; 63.819,119.089 63.895,119.089 ; 63.819,119.114 63.921,119.114 ; 63.819,123.229 63.895,123.229 ; 63.845,119.14 63.921,119.14 ; 63.845,119.165 63.946,119.165 ; 63.845,123.153 63.946,123.153 ; 63.845,123.178 63.921,123.178 ; 63.845,123.204 63.921,123.204 ; 63.87,119.191 63.946,119.191 ; 63.87,119.216 63.946,119.216 ; 63.87,123.102 63.946,123.102 ; 63.87,123.128 63.946,123.128 ; 63.895,119.241 63.972,119.241 ; 63.895,119.267 63.972,119.267 ; 63.895,119.292 63.972,119.292 ; 63.895,119.318 63.972,119.318 ; 63.895,123.001 63.997,123.001 ; 63.895,123.026 63.972,123.026 ; 63.895,123.051 63.972,123.051 ; 63.895,123.077 63.972,123.077 ; 63.921,119.343 63.997,119.343 ; 63.921,119.368 63.997,119.368 ; 63.921,119.394 63.997,119.394 ; 63.921,119.419 63.997,119.419 ; 63.921,119.445 63.997,119.445 ; 63.921,119.47 63.997,119.47 ; 63.921,119.495 63.997,119.495 ; 63.921,119.521 63.997,119.521 ; 63.921,119.546 63.997,119.546 ; 63.921,119.572 63.997,119.572 ; 63.921,119.597 63.997,119.597 ; 63.921,119.622 63.997,119.622 ; 63.921,119.648 63.997,119.648 ; 63.921,119.673 63.997,119.673 ; 63.921,119.699 63.997,119.699 ; 63.921,119.724 63.997,119.724 ; 63.921,119.749 63.997,119.749 ; 63.921,119.775 63.997,119.775 ; 63.921,119.8 63.997,119.8 ; 63.921,119.826 63.997,119.826 ; 63.921,119.851 63.997,119.851 ; 63.921,119.876 63.997,119.876 ; 63.921,119.902 63.997,119.902 ; 63.921,119.927 63.997,119.927 ; 63.921,119.953 63.997,119.953 ; 63.921,119.978 63.997,119.978 ; 63.921,120.003 63.997,120.003 ; 63.921,120.029 63.997,120.029 ; 63.921,120.054 63.997,120.054 ; 63.921,120.08 63.997,120.08 ; 63.921,120.105 63.997,120.105 ; 63.921,120.13 63.997,120.13 ; 63.921,120.156 63.997,120.156 ; 63.921,120.181 63.997,120.181 ; 63.921,120.207 63.997,120.207 ; 63.921,120.232 63.997,120.232 ; 63.921,120.257 63.997,120.257 ; 63.921,120.283 63.997,120.283 ; 63.921,120.308 63.997,120.308 ; 63.921,120.334 63.997,120.334 ; 63.921,120.359 63.997,120.359 ; 63.921,120.384 63.997,120.384 ; 63.921,120.41 63.997,120.41 ; 63.921,120.435 63.997,120.435 ; 63.921,120.461 63.997,120.461 ; 63.921,120.486 63.997,120.486 ; 63.921,120.511 63.997,120.511 ; 63.921,120.537 63.997,120.537 ; 63.921,120.562 63.997,120.562 ; 63.921,120.588 63.997,120.588 ; 63.921,120.613 63.997,120.613 ; 63.921,120.638 63.997,120.638 ; 63.921,120.664 63.997,120.664 ; 63.921,120.689 63.997,120.689 ; 63.921,120.715 63.997,120.715 ; 63.921,120.74 63.997,120.74 ; 63.921,120.765 63.997,120.765 ; 63.921,120.791 63.997,120.791 ; 63.921,120.816 63.997,120.816 ; 63.921,120.842 63.997,120.842 ; 63.921,120.867 63.997,120.867 ; 63.921,120.892 63.997,120.892 ; 63.921,120.918 63.997,120.918 ; 63.921,120.943 63.997,120.943 ; 63.921,120.969 63.997,120.969 ; 63.921,120.994 63.997,120.994 ; 63.921,121.019 63.997,121.019 ; 63.921,121.045 63.997,121.045 ; 63.921,121.07 63.997,121.07 ; 63.921,121.096 63.997,121.096 ; 63.921,121.121 63.997,121.121 ; 63.921,121.146 63.997,121.146 ; 63.921,121.172 63.997,121.172 ; 63.921,121.197 63.997,121.197 ; 63.921,121.223 63.997,121.223 ; 63.921,121.248 63.997,121.248 ; 63.921,121.273 63.997,121.273 ; 63.921,121.299 63.997,121.299 ; 63.921,121.324 63.997,121.324 ; 63.921,121.35 63.997,121.35 ; 63.921,121.375 63.997,121.375 ; 63.921,121.4 63.997,121.4 ; 63.921,121.426 63.997,121.426 ; 63.921,121.451 63.997,121.451 ; 63.921,121.477 63.997,121.477 ; 63.921,121.502 63.997,121.502 ; 63.921,121.527 63.997,121.527 ; 63.921,121.553 63.997,121.553 ; 63.921,121.578 63.997,121.578 ; 63.921,121.604 63.997,121.604 ; 63.921,121.629 63.997,121.629 ; 63.921,121.654 63.997,121.654 ; 63.921,121.68 63.997,121.68 ; 63.921,121.705 63.997,121.705 ; 63.921,121.731 63.997,121.731 ; 63.921,121.756 63.997,121.756 ; 63.921,121.781 63.997,121.781 ; 63.921,121.807 63.997,121.807 ; 63.921,121.832 63.997,121.832 ; 63.921,121.858 63.997,121.858 ; 63.921,121.883 63.997,121.883 ; 63.921,121.908 63.997,121.908 ; 63.921,121.934 63.997,121.934 ; 63.921,121.959 63.997,121.959 ; 63.921,121.985 63.997,121.985 ; 63.921,122.01 63.997,122.01 ; 63.921,122.035 63.997,122.035 ; 63.921,122.061 63.997,122.061 ; 63.921,122.086 63.997,122.086 ; 63.921,122.112 63.997,122.112 ; 63.921,122.137 63.997,122.137 ; 63.921,122.162 63.997,122.162 ; 63.921,122.188 63.997,122.188 ; 63.921,122.213 63.997,122.213 ; 63.921,122.239 63.997,122.239 ; 63.921,122.264 63.997,122.264 ; 63.921,122.289 63.997,122.289 ; 63.921,122.315 63.997,122.315 ; 63.921,122.34 63.997,122.34 ; 63.921,122.366 63.997,122.366 ; 63.921,122.391 63.997,122.391 ; 63.921,122.416 63.997,122.416 ; 63.921,122.442 63.997,122.442 ; 63.921,122.467 63.997,122.467 ; 63.921,122.493 63.997,122.493 ; 63.921,122.518 63.997,122.518 ; 63.921,122.543 63.997,122.543 ; 63.921,122.569 63.997,122.569 ; 63.921,122.594 63.997,122.594 ; 63.921,122.62 63.997,122.62 ; 63.921,122.645 63.997,122.645 ; 63.921,122.67 63.997,122.67 ; 63.921,122.696 63.997,122.696 ; 63.921,122.721 63.997,122.721 ; 63.921,122.747 63.997,122.747 ; 63.921,122.772 63.997,122.772 ; 63.921,122.797 63.997,122.797 ; 63.921,122.823 63.997,122.823 ; 63.921,122.848 63.997,122.848 ; 63.921,122.874 63.997,122.874 ; 63.921,122.899 63.997,122.899 ; 63.921,122.924 63.997,122.924 ; 63.921,122.95 63.997,122.95 ; 63.921,122.975 63.997,122.975

## Polygon pours and split planes (outlines as drawn)
GND on Bottom Layer "Top Layer-No Net" (solid, remove dead copper, pour order 4): 66.04,125.806 33.655,125.806 33.63,125.781 33.63,78.816 66.04,78.816 66.04,125.806
GND on Top Layer "Top Layer-No Net" (solid, remove dead copper, pour order 6): 66.04,125.806 66.065,125.781 66.065,78.765 66.04,78.765 65.989,78.816 65.964,78.842 33.655,78.842 33.63,78.867 33.63,125.806

## Keep-outs
Keep-Out Layer:
  lines w0.1: 30,30 134,30 ; 65.989,125.82 33.644,125.82 33.644,78.816 66.04,78.816 ; 66.029,78.881 66.029,125.871 ; 66.644,30.83 99.41,30.83